# EAGLE board Magician_encoder-Panel-v11 (EAGLE 6.5.0), part 1 of 2
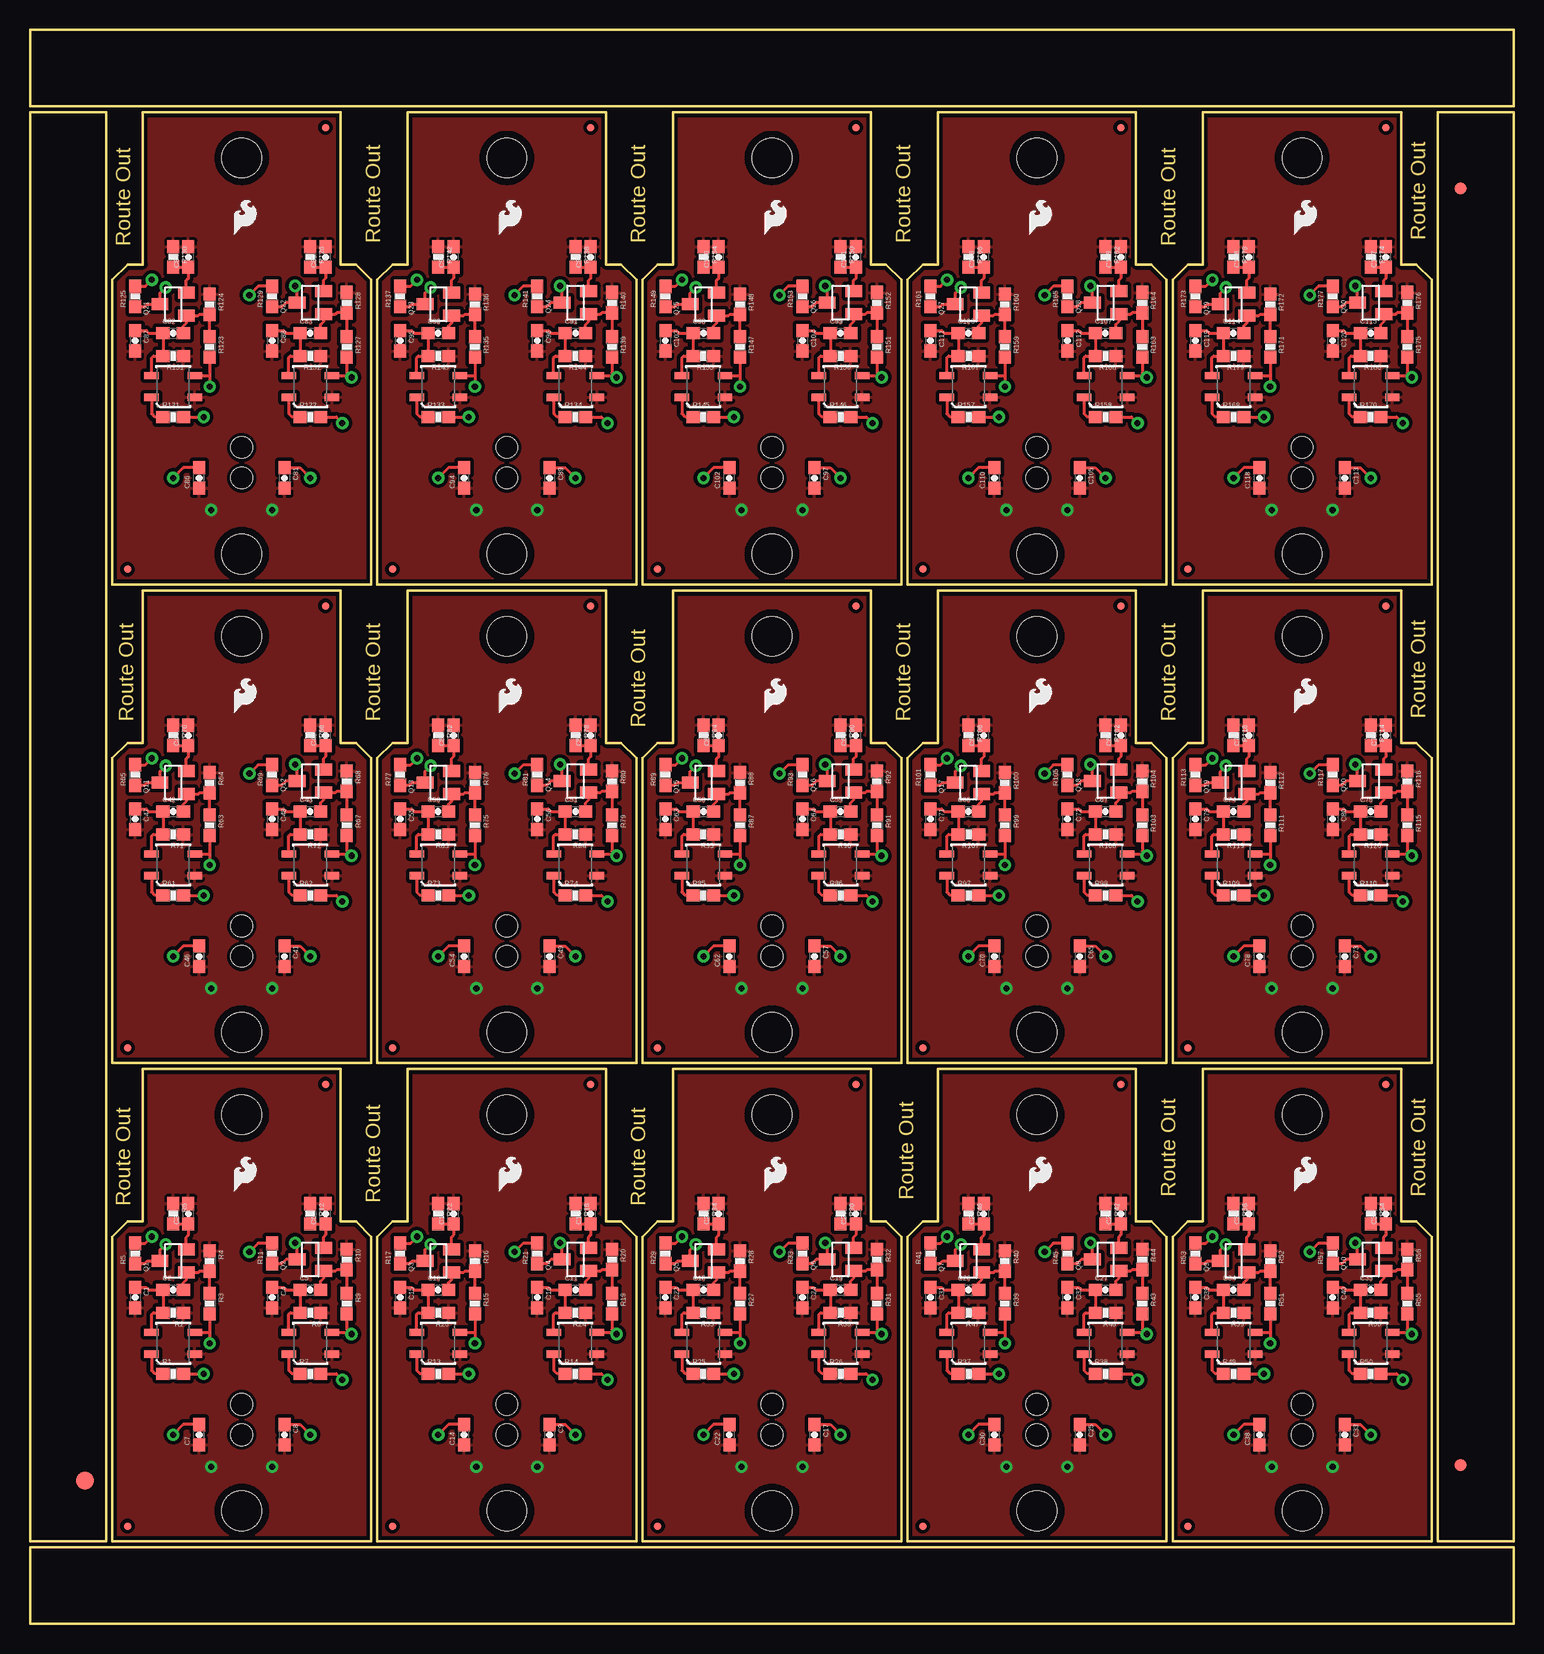
[diagram p0: board, top side]
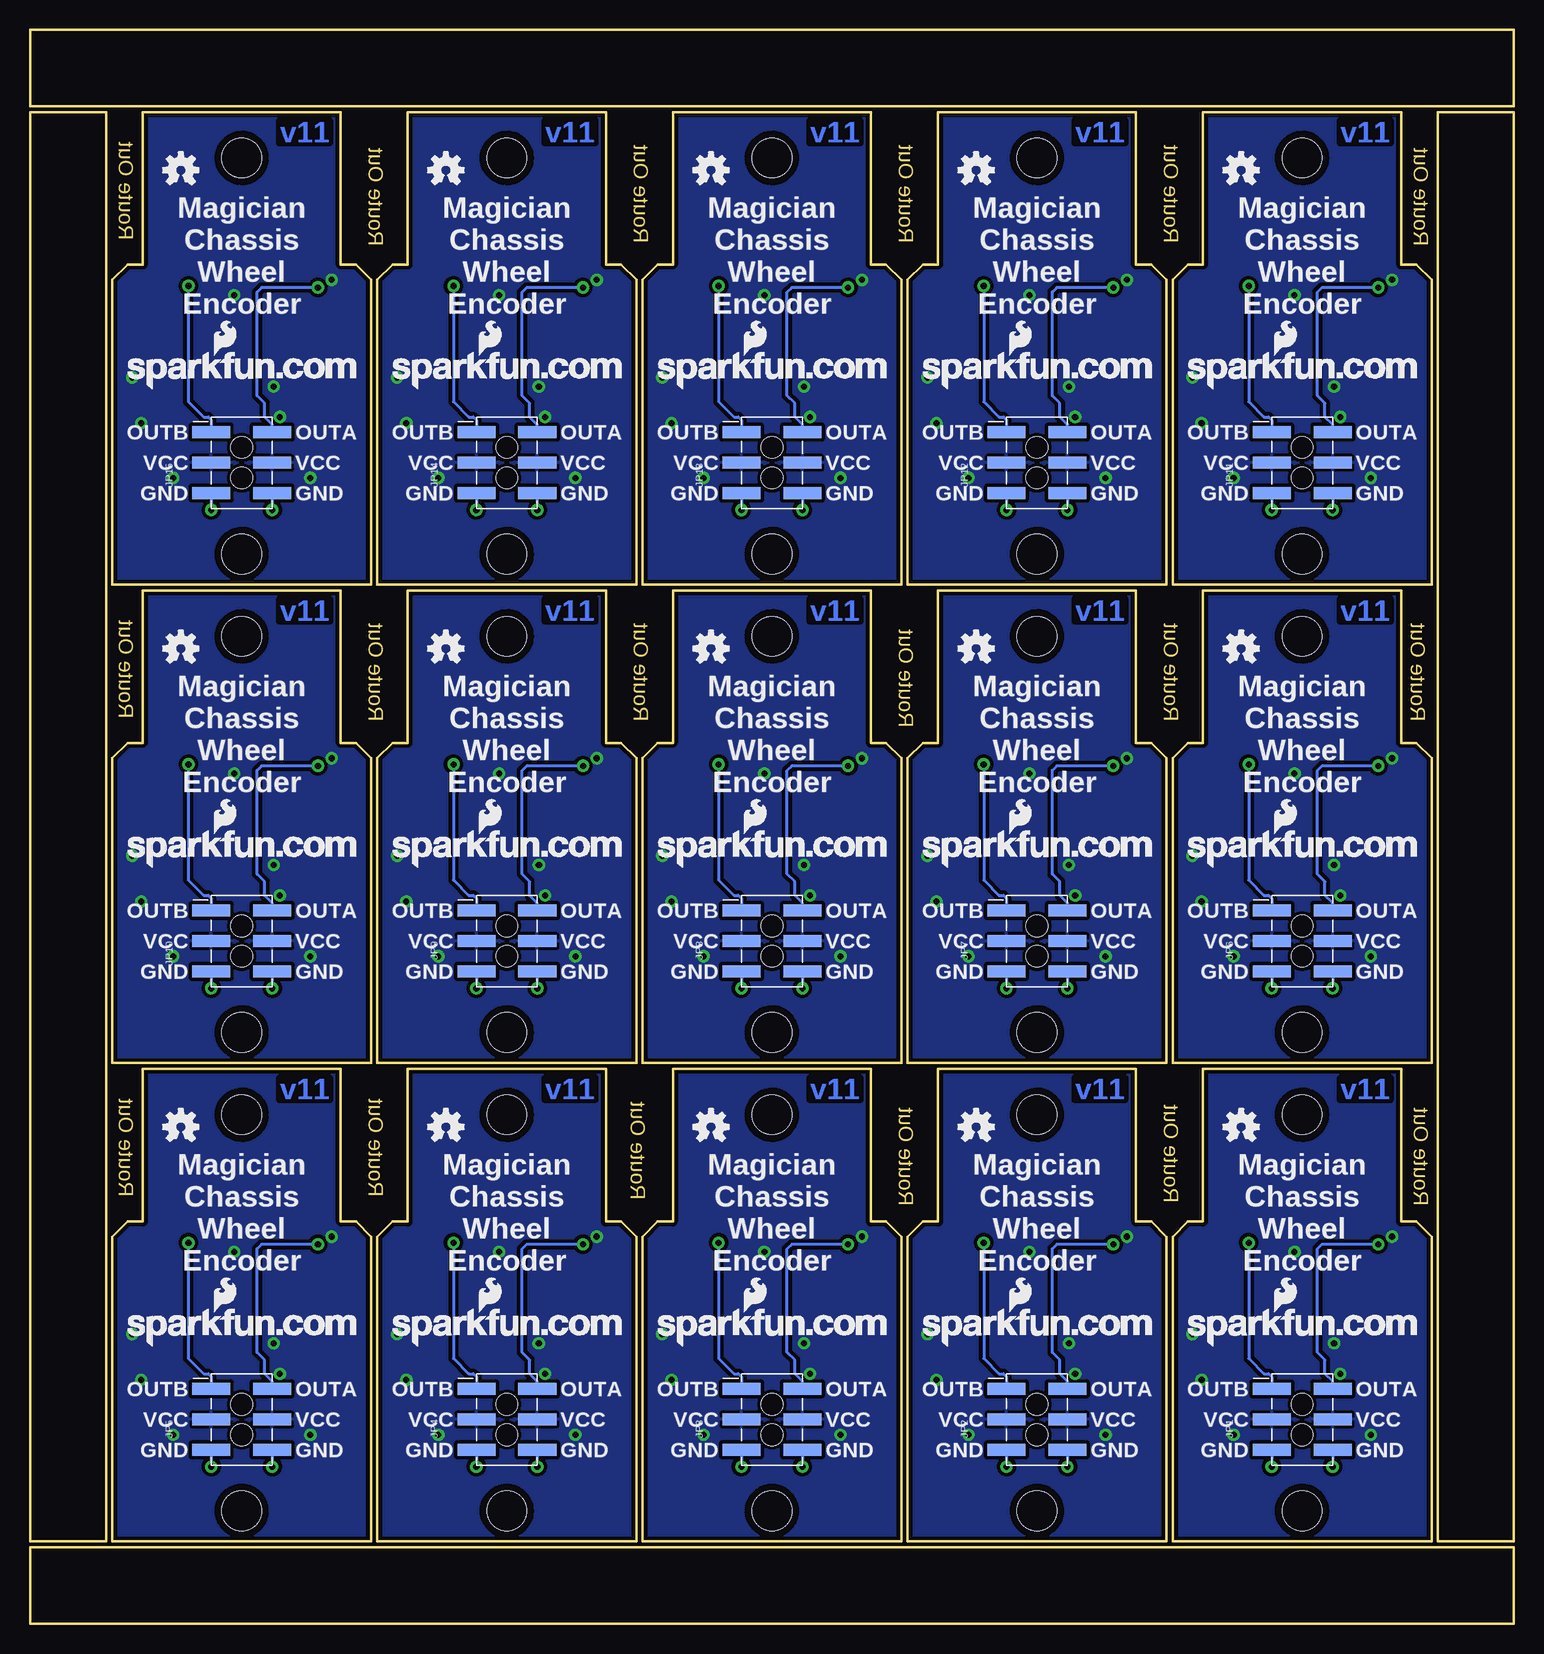
[diagram p1: board, bottom side, seen from below]

Size 123.7 x 132.84 mm. Coordinates in mm from the lower left corner, seen from the top.
Outline: 28.45,32.26 28.45,6.86 6.86,6.86 6.86,32.26 8.13,33.53 9.4,33.53 9.4,46.23 25.91,46.23 25.91,33.53 27.18,33.53 28.45,32.26
Outline: 50.55,32.26 50.55,6.86 28.96,6.86 28.96,32.26 30.23,33.53 31.5,33.53 31.5,46.23 48.01,46.23 48.01,33.53 49.28,33.53 50.55,32.26
Outline: 72.64,32.26 72.64,6.86 51.05,6.86 51.05,32.26 52.32,33.53 53.59,33.53 53.59,46.23 70.1,46.23 70.1,33.53 71.37,33.53 72.64,32.26
Outline: 94.74,32.26 94.74,6.86 73.15,6.86 73.15,32.26 74.42,33.53 75.69,33.53 75.69,46.23 92.2,46.23 92.2,33.53 93.47,33.53 94.74,32.26
Outline: 116.84,32.26 116.84,6.86 95.25,6.86 95.25,32.26 96.52,33.53 97.79,33.53 97.79,46.23 114.3,46.23 114.3,33.53 115.57,33.53 116.84,32.26
Outline: 28.45,72.14 28.45,46.74 6.86,46.74 6.86,72.14 8.13,73.41 9.4,73.41 9.4,86.11 25.91,86.11 25.91,73.41 27.18,73.41 28.45,72.14
Outline: 50.55,72.14 50.55,46.74 28.96,46.74 28.96,72.14 30.23,73.41 31.5,73.41 31.5,86.11 48.01,86.11 48.01,73.41 49.28,73.41 50.55,72.14
Outline: 72.64,72.14 72.64,46.74 51.05,46.74 51.05,72.14 52.32,73.41 53.59,73.41 53.59,86.11 70.1,86.11 70.1,73.41 71.37,73.41 72.64,72.14
Outline: 94.74,72.14 94.74,46.74 73.15,46.74 73.15,72.14 74.42,73.41 75.69,73.41 75.69,86.11 92.2,86.11 92.2,73.41 93.47,73.41 94.74,72.14
Outline: 116.84,72.14 116.84,46.74 95.25,46.74 95.25,72.14 96.52,73.41 97.79,73.41 97.79,86.11 114.3,86.11 114.3,73.41 115.57,73.41 116.84,72.14
Outline: 28.45,112.01 28.45,86.61 6.86,86.61 6.86,112.01 8.13,113.28 9.4,113.28 9.4,125.98 25.91,125.98 25.91,113.28 27.18,113.28 28.45,112.01
Outline: 50.55,112.01 50.55,86.61 28.96,86.61 28.96,112.01 30.23,113.28 31.5,113.28 31.5,125.98 48.01,125.98 48.01,113.28 49.28,113.28 50.55,112.01
Outline: 72.64,112.01 72.64,86.61 51.05,86.61 51.05,112.01 52.32,113.28 53.59,113.28 53.59,125.98 70.1,125.98 70.1,113.28 71.37,113.28 72.64,112.01
Outline: 94.74,112.01 94.74,86.61 73.15,86.61 73.15,112.01 74.42,113.28 75.69,113.28 75.69,125.98 92.2,125.98 92.2,113.28 93.47,113.28 94.74,112.01
Outline: 116.84,112.01 116.84,86.61 95.25,86.61 95.25,112.01 96.52,113.28 97.79,113.28 97.79,125.98 114.3,125.98 114.3,113.28 115.57,113.28 116.84,112.01
Outline: 6.35,6.86 6.35,125.98 0,125.98 0,6.86 6.35,6.86
Outline: 0,0 123.7,0 123.7,6.35 0,6.35 0,0
Outline: 123.7,6.86 123.7,125.98 117.35,125.98 117.35,6.86 123.7,6.86
Outline: 123.7,132.84 0,132.84 0,126.49 123.7,126.49 123.7,132.84
Copper layers (1*16): Top 0.035mm / dielectric 1.5mm / Bottom 0.035mm
Design rules "Sparkfun": minimum track width 8mil, minimum drill 20mil, track to track 8mil, track to pad 8mil, pad to pad 8mil, via to via 8mil, smd to smd 8mil, copper to edge 8mil, drill to drill 8mil, minimum pad ring 12mil, minimum via ring 10mil, stop-mask expansion 4mil, vias tented up to drill 20mil, thermal gap 10mil

## Footprints (pad centres in the part's own frame; a part is rotated, then mirrored left to right if it is on the bottom)
0603-CAP = smd 1.1 x 1: 1 -0.85,0; 2 0.85,0
FIDUCIAL-1.5X3 = smd 1.5 x 1.5: 1 0,0
FIDUCIAL-1X2 = smd 1 x 1: 1 0,0
MICRO-FIDUCIAL = smd 0.635 x 0.635: 1 0,0
2X3_SMT_POSTS = smd 1 x 3.17: 1 -2.54,-2.54; 2 -2.54,2.54; 3 0,-2.54; 4 0,2.54; 5 2.54,-2.54; 6 2.54,2.54 | hole 1.8: -1.27,0; 1.27,0
SOT23 = smd 1 x 1.4: 1 -0.95,-1.1; 2 0.95,-1.1; 3 0,1.1
0603-RES = smd 1.1 x 1: 1 -0.85,0; 2 0.85,0
STAND-OFF = hole 3.302: 0,0
QRE1113 = smd 1.2 x 0.6: 1 -1.8,-0.9; 2 1.8,-0.9; 3 1.8,0.9; 4 -1.8,0.9

## Placement (x,y rotation side)
C1  0.1uF  [0603-CAP]  8.76,27.18 270 top
C2  1.0uF  [0603-CAP]  11.94,27.81 0 top
C3  0.1uF  [0603-CAP]  13.21,34.16 90 top
C4  0.1uF  [0603-CAP]  20.19,27.18 270 top
C5  1.0uF  [0603-CAP]  23.37,27.81 0 top
C6  0.1uF  [0603-CAP]  24.64,34.16 90 top
C7  1.0uF  [0603-CAP]  14.1,15.75 90 top
C8  0.1uF  [0603-CAP]  21.21,15.75 270 top
C9  0.1uF  [0603-CAP]  43.31,15.75 270 top
C10  1.0uF  [0603-CAP]  34.04,27.81 0 top
C11  1.0uF  [0603-CAP]  45.47,27.81 0 top
C12  0.1uF  [0603-CAP]  35.31,34.16 90 top
C13  0.1uF  [0603-CAP]  46.74,34.16 90 top
C14  1.0uF  [0603-CAP]  36.2,15.75 90 top
C15  0.1uF  [0603-CAP]  30.86,27.18 270 top
C16  0.1uF  [0603-CAP]  42.29,27.18 270 top
C17  0.1uF  [0603-CAP]  65.41,15.75 270 top
C18  1.0uF  [0603-CAP]  56.13,27.81 0 top
C19  1.0uF  [0603-CAP]  67.56,27.81 0 top
C20  0.1uF  [0603-CAP]  57.4,34.16 90 top
C21  0.1uF  [0603-CAP]  68.83,34.16 90 top
C22  1.0uF  [0603-CAP]  58.29,15.75 90 top
C23  0.1uF  [0603-CAP]  52.96,27.18 270 top
C24  0.1uF  [0603-CAP]  64.39,27.18 270 top
C25  0.1uF  [0603-CAP]  87.5,15.75 270 top
C26  1.0uF  [0603-CAP]  78.23,27.81 0 top
C27  1.0uF  [0603-CAP]  89.66,27.81 0 top
C28  0.1uF  [0603-CAP]  79.5,34.16 90 top
C29  0.1uF  [0603-CAP]  90.93,34.16 90 top
C30  1.0uF  [0603-CAP]  80.39,15.75 90 top
C31  0.1uF  [0603-CAP]  75.06,27.18 270 top
C32  0.1uF  [0603-CAP]  86.49,27.18 270 top
C33  0.1uF  [0603-CAP]  109.6,15.75 270 top
C34  1.0uF  [0603-CAP]  100.33,27.81 0 top
C35  1.0uF  [0603-CAP]  111.76,27.81 0 top
C36  0.1uF  [0603-CAP]  101.6,34.16 90 top
C37  0.1uF  [0603-CAP]  113.03,34.16 90 top
C38  1.0uF  [0603-CAP]  102.49,15.75 90 top
C39  0.1uF  [0603-CAP]  97.16,27.18 270 top
C40  0.1uF  [0603-CAP]  108.59,27.18 270 top
C41  0.1uF  [0603-CAP]  21.21,55.63 270 top
C42  1.0uF  [0603-CAP]  11.94,67.69 0 top
C43  1.0uF  [0603-CAP]  23.37,67.69 0 top
C44  0.1uF  [0603-CAP]  13.21,74.04 90 top
C45  0.1uF  [0603-CAP]  24.64,74.04 90 top
C46  1.0uF  [0603-CAP]  14.1,55.63 90 top
C47  0.1uF  [0603-CAP]  8.76,67.06 270 top
C48  0.1uF  [0603-CAP]  20.19,67.06 270 top
C49  0.1uF  [0603-CAP]  43.31,55.63 270 top
C50  1.0uF  [0603-CAP]  34.04,67.69 0 top
C51  1.0uF  [0603-CAP]  45.47,67.69 0 top
C52  0.1uF  [0603-CAP]  35.31,74.04 90 top
C53  0.1uF  [0603-CAP]  46.74,74.04 90 top
C54  1.0uF  [0603-CAP]  36.2,55.63 90 top
C55  0.1uF  [0603-CAP]  30.86,67.06 270 top
C56  0.1uF  [0603-CAP]  42.29,67.06 270 top
C57  0.1uF  [0603-CAP]  65.41,55.63 270 top
C58  1.0uF  [0603-CAP]  56.13,67.69 0 top
C59  1.0uF  [0603-CAP]  67.56,67.69 0 top
C60  0.1uF  [0603-CAP]  57.4,74.04 90 top
C61  0.1uF  [0603-CAP]  68.83,74.04 90 top
C62  1.0uF  [0603-CAP]  58.29,55.63 90 top
C63  0.1uF  [0603-CAP]  52.96,67.06 270 top
C64  0.1uF  [0603-CAP]  64.39,67.06 270 top
C65  0.1uF  [0603-CAP]  87.5,55.63 270 top
C66  1.0uF  [0603-CAP]  78.23,67.69 0 top
C67  1.0uF  [0603-CAP]  89.66,67.69 0 top
C68  0.1uF  [0603-CAP]  79.5,74.04 90 top
C69  0.1uF  [0603-CAP]  90.93,74.04 90 top
C70  1.0uF  [0603-CAP]  80.39,55.63 90 top
C71  0.1uF  [0603-CAP]  75.06,67.06 270 top
C72  0.1uF  [0603-CAP]  86.49,67.06 270 top
C73  0.1uF  [0603-CAP]  109.6,55.63 270 top
C74  1.0uF  [0603-CAP]  100.33,67.69 0 top
C75  1.0uF  [0603-CAP]  111.76,67.69 0 top
C76  0.1uF  [0603-CAP]  101.6,74.04 90 top
C77  0.1uF  [0603-CAP]  113.03,74.04 90 top
C78  1.0uF  [0603-CAP]  102.49,55.63 90 top
C79  0.1uF  [0603-CAP]  97.16,67.06 270 top
C80  0.1uF  [0603-CAP]  108.59,67.06 270 top
C81  0.1uF  [0603-CAP]  21.21,95.5 270 top
C82  1.0uF  [0603-CAP]  11.94,107.57 0 top
C83  1.0uF  [0603-CAP]  23.37,107.57 0 top
C84  0.1uF  [0603-CAP]  13.21,113.92 90 top
C85  0.1uF  [0603-CAP]  24.64,113.92 90 top
C86  1.0uF  [0603-CAP]  14.1,95.5 90 top
C87  0.1uF  [0603-CAP]  8.76,106.93 270 top
C88  0.1uF  [0603-CAP]  20.19,106.93 270 top
C89  0.1uF  [0603-CAP]  43.31,95.5 270 top
C90  1.0uF  [0603-CAP]  34.04,107.57 0 top
C91  1.0uF  [0603-CAP]  45.47,107.57 0 top
C92  0.1uF  [0603-CAP]  35.31,113.92 90 top
C93  0.1uF  [0603-CAP]  46.74,113.92 90 top
C94  1.0uF  [0603-CAP]  36.2,95.5 90 top
C95  0.1uF  [0603-CAP]  30.86,106.93 270 top
C96  0.1uF  [0603-CAP]  42.29,106.93 270 top
C97  0.1uF  [0603-CAP]  65.41,95.5 270 top
C98  1.0uF  [0603-CAP]  56.13,107.57 0 top
C99  1.0uF  [0603-CAP]  67.56,107.57 0 top
C100  0.1uF  [0603-CAP]  57.4,113.92 90 top
C101  0.1uF  [0603-CAP]  68.83,113.92 90 top
C102  1.0uF  [0603-CAP]  58.29,95.5 90 top
C103  0.1uF  [0603-CAP]  52.96,106.93 270 top
C104  0.1uF  [0603-CAP]  64.39,106.93 270 top
C105  0.1uF  [0603-CAP]  87.5,95.5 270 top
C106  1.0uF  [0603-CAP]  78.23,107.57 0 top
C107  1.0uF  [0603-CAP]  89.66,107.57 0 top
C108  0.1uF  [0603-CAP]  79.5,113.92 90 top
C109  0.1uF  [0603-CAP]  90.93,113.92 90 top
C110  1.0uF  [0603-CAP]  80.39,95.5 90 top
C111  0.1uF  [0603-CAP]  75.06,106.93 270 top
C112  0.1uF  [0603-CAP]  86.49,106.93 270 top
C113  0.1uF  [0603-CAP]  109.6,95.5 270 top
C114  1.0uF  [0603-CAP]  100.33,107.57 0 top
C115  1.0uF  [0603-CAP]  111.76,107.57 0 top
C116  0.1uF  [0603-CAP]  101.6,113.92 90 top
C117  0.1uF  [0603-CAP]  113.03,113.92 90 top
C118  1.0uF  [0603-CAP]  102.49,95.5 90 top
C119  0.1uF  [0603-CAP]  97.16,106.93 270 top
C120  0.1uF  [0603-CAP]  108.59,106.93 270 top
E$1  [FIDUCIAL-1.5X3]  4.57,11.94 0 top
E$4  [FIDUCIAL-1X2]  119.25,13.21 0 top
E$5  [FIDUCIAL-1X2]  119.25,119.63 180 top
FID1  FIDUCIALUFIDUCIAL  [MICRO-FIDUCIAL]  24.64,44.96 0 top
FID2  FIDUCIALUFIDUCIAL  [MICRO-FIDUCIAL]  8.13,8.13 0 top
FID3  FIDUCIALUFIDUCIAL  [MICRO-FIDUCIAL]  46.74,44.96 0 top
FID4  FIDUCIALUFIDUCIAL  [MICRO-FIDUCIAL]  30.23,8.13 0 top
FID5  FIDUCIALUFIDUCIAL  [MICRO-FIDUCIAL]  68.83,44.96 0 top
FID6  FIDUCIALUFIDUCIAL  [MICRO-FIDUCIAL]  52.32,8.13 0 top
FID7  FIDUCIALUFIDUCIAL  [MICRO-FIDUCIAL]  90.93,44.96 0 top
FID8  FIDUCIALUFIDUCIAL  [MICRO-FIDUCIAL]  74.42,8.13 0 top
FID9  FIDUCIALUFIDUCIAL  [MICRO-FIDUCIAL]  113.03,44.96 0 top
FID10  FIDUCIALUFIDUCIAL  [MICRO-FIDUCIAL]  96.52,8.13 0 top
FID11  FIDUCIALUFIDUCIAL  [MICRO-FIDUCIAL]  24.64,84.84 0 top
FID12  FIDUCIALUFIDUCIAL  [MICRO-FIDUCIAL]  8.13,48.01 0 top
FID13  FIDUCIALUFIDUCIAL  [MICRO-FIDUCIAL]  46.74,84.84 0 top
FID14  FIDUCIALUFIDUCIAL  [MICRO-FIDUCIAL]  30.23,48.01 0 top
FID15  FIDUCIALUFIDUCIAL  [MICRO-FIDUCIAL]  68.83,84.84 0 top
FID16  FIDUCIALUFIDUCIAL  [MICRO-FIDUCIAL]  52.32,48.01 0 top
FID17  FIDUCIALUFIDUCIAL  [MICRO-FIDUCIAL]  90.93,84.84 0 top
FID18  FIDUCIALUFIDUCIAL  [MICRO-FIDUCIAL]  74.42,48.01 0 top
FID19  FIDUCIALUFIDUCIAL  [MICRO-FIDUCIAL]  113.03,84.84 0 top
FID20  FIDUCIALUFIDUCIAL  [MICRO-FIDUCIAL]  96.52,48.01 0 top
FID21  FIDUCIALUFIDUCIAL  [MICRO-FIDUCIAL]  24.64,124.71 0 top
FID22  FIDUCIALUFIDUCIAL  [MICRO-FIDUCIAL]  8.13,87.88 0 top
FID23  FIDUCIALUFIDUCIAL  [MICRO-FIDUCIAL]  46.74,124.71 0 top
FID24  FIDUCIALUFIDUCIAL  [MICRO-FIDUCIAL]  30.23,87.88 0 top
FID25  FIDUCIALUFIDUCIAL  [MICRO-FIDUCIAL]  68.83,124.71 0 top
FID26  FIDUCIALUFIDUCIAL  [MICRO-FIDUCIAL]  52.32,87.88 0 top
FID27  FIDUCIALUFIDUCIAL  [MICRO-FIDUCIAL]  90.93,124.71 0 top
FID28  FIDUCIALUFIDUCIAL  [MICRO-FIDUCIAL]  74.42,87.88 0 top
FID29  FIDUCIALUFIDUCIAL  [MICRO-FIDUCIAL]  113.03,124.71 0 top
FID30  FIDUCIALUFIDUCIAL  [MICRO-FIDUCIAL]  96.52,87.88 0 top
JP1  [2X3_SMT_POSTS]  17.65,17.02 270 bottom
JP2  [2X3_SMT_POSTS]  39.75,17.02 270 bottom
JP3  [2X3_SMT_POSTS]  61.85,17.02 270 bottom
JP4  [2X3_SMT_POSTS]  83.95,17.02 270 bottom
JP5  [2X3_SMT_POSTS]  106.05,17.02 270 bottom
JP6  [2X3_SMT_POSTS]  17.65,56.9 270 bottom
JP7  [2X3_SMT_POSTS]  39.75,56.9 270 bottom
JP8  [2X3_SMT_POSTS]  61.85,56.9 270 bottom
JP9  [2X3_SMT_POSTS]  83.95,56.9 270 bottom
JP10  [2X3_SMT_POSTS]  106.05,56.9 270 bottom
JP11  [2X3_SMT_POSTS]  17.65,96.77 270 bottom
JP12  [2X3_SMT_POSTS]  39.75,96.77 270 bottom
JP13  [2X3_SMT_POSTS]  61.85,96.77 270 bottom
JP14  [2X3_SMT_POSTS]  83.95,96.77 270 bottom
JP15  [2X3_SMT_POSTS]  106.05,96.77 270 bottom
LOGO1  LOGO-SFESK  [SFE-LOGO-FLAME]  17.02,36.07 0 top
LOGO2  OSHW-LOGOS  [OSHW-LOGO-S]  44.83,41.4 0 bottom
LOGO3  OSHW-LOGOS  [OSHW-LOGO-S]  22.73,41.4 0 bottom
LOGO4  LOGO-SFENEW  [SFE-NEW-WEBLOGO]  27.18,23.11 0 bottom
LOGO5  LOGO-SFENEW  [SFE-NEW-WEBLOGO]  49.28,23.11 0 bottom
LOGO6  LOGO-SFESK  [SFE-LOGO-FLAME]  39.12,36.07 0 top
LOGO7  OSHW-LOGOS  [OSHW-LOGO-S]  66.93,41.4 0 bottom
LOGO8  LOGO-SFENEW  [SFE-NEW-WEBLOGO]  71.37,23.11 0 bottom
LOGO9  LOGO-SFESK  [SFE-LOGO-FLAME]  61.21,36.07 0 top
LOGO10  OSHW-LOGOS  [OSHW-LOGO-S]  89.03,41.4 0 bottom
LOGO11  LOGO-SFENEW  [SFE-NEW-WEBLOGO]  93.47,23.11 0 bottom
LOGO12  LOGO-SFESK  [SFE-LOGO-FLAME]  83.31,36.07 0 top
LOGO13  OSHW-LOGOS  [OSHW-LOGO-S]  111.12,41.4 0 bottom
LOGO14  LOGO-SFENEW  [SFE-NEW-WEBLOGO]  115.57,23.11 0 bottom
LOGO15  LOGO-SFESK  [SFE-LOGO-FLAME]  105.41,36.07 0 top
LOGO16  OSHW-LOGOS  [OSHW-LOGO-S]  22.73,81.28 0 bottom
LOGO17  LOGO-SFENEW  [SFE-NEW-WEBLOGO]  27.18,62.99 0 bottom
LOGO18  LOGO-SFESK  [SFE-LOGO-FLAME]  17.02,75.95 0 top
LOGO19  OSHW-LOGOS  [OSHW-LOGO-S]  44.83,81.28 0 bottom
LOGO20  LOGO-SFENEW  [SFE-NEW-WEBLOGO]  49.28,62.99 0 bottom
LOGO21  LOGO-SFESK  [SFE-LOGO-FLAME]  39.12,75.95 0 top
LOGO22  OSHW-LOGOS  [OSHW-LOGO-S]  66.93,81.28 0 bottom
LOGO23  LOGO-SFENEW  [SFE-NEW-WEBLOGO]  71.37,62.99 0 bottom
LOGO24  LOGO-SFESK  [SFE-LOGO-FLAME]  61.21,75.95 0 top
LOGO25  OSHW-LOGOS  [OSHW-LOGO-S]  89.03,81.28 0 bottom
LOGO26  LOGO-SFENEW  [SFE-NEW-WEBLOGO]  93.47,62.99 0 bottom
LOGO27  LOGO-SFESK  [SFE-LOGO-FLAME]  83.31,75.95 0 top
LOGO28  OSHW-LOGOS  [OSHW-LOGO-S]  111.12,81.28 0 bottom
LOGO29  LOGO-SFENEW  [SFE-NEW-WEBLOGO]  115.57,62.99 0 bottom
LOGO30  LOGO-SFESK  [SFE-LOGO-FLAME]  105.41,75.95 0 top
LOGO31  OSHW-LOGOS  [OSHW-LOGO-S]  22.73,121.16 0 bottom
LOGO32  LOGO-SFENEW  [SFE-NEW-WEBLOGO]  27.18,102.87 0 bottom
LOGO33  LOGO-SFESK  [SFE-LOGO-FLAME]  17.02,115.82 0 top
LOGO34  OSHW-LOGOS  [OSHW-LOGO-S]  44.83,121.16 0 bottom
LOGO35  LOGO-SFENEW  [SFE-NEW-WEBLOGO]  49.28,102.87 0 bottom
LOGO36  LOGO-SFESK  [SFE-LOGO-FLAME]  39.12,115.82 0 top
LOGO37  OSHW-LOGOS  [OSHW-LOGO-S]  66.93,121.16 0 bottom
LOGO38  LOGO-SFENEW  [SFE-NEW-WEBLOGO]  71.37,102.87 0 bottom
LOGO39  LOGO-SFESK  [SFE-LOGO-FLAME]  61.21,115.82 0 top
LOGO40  OSHW-LOGOS  [OSHW-LOGO-S]  89.03,121.16 0 bottom
LOGO41  LOGO-SFENEW  [SFE-NEW-WEBLOGO]  93.47,102.87 0 bottom
LOGO42  LOGO-SFESK  [SFE-LOGO-FLAME]  83.31,115.82 0 top
LOGO43  OSHW-LOGOS  [OSHW-LOGO-S]  111.12,121.16 0 bottom
LOGO44  LOGO-SFENEW  [SFE-NEW-WEBLOGO]  115.57,102.87 0 bottom
LOGO45  LOGO-SFESK  [SFE-LOGO-FLAME]  105.41,115.82 0 top
Q1  MMBT2222A  [SOT23]  11.94,30.23 90 top
Q2  MMBT2222A  [SOT23]  23.37,30.35 90 top
Q3  MMBT2222A  [SOT23]  34.04,30.23 90 top
Q4  MMBT2222A  [SOT23]  45.47,30.35 90 top
Q5  MMBT2222A  [SOT23]  56.13,30.23 90 top
Q6  MMBT2222A  [SOT23]  67.56,30.35 90 top
Q7  MMBT2222A  [SOT23]  78.23,30.23 90 top
Q8  MMBT2222A  [SOT23]  89.66,30.35 90 top
Q9  MMBT2222A  [SOT23]  100.33,30.23 90 top
Q10  MMBT2222A  [SOT23]  111.76,30.35 90 top
Q11  MMBT2222A  [SOT23]  11.94,70.1 90 top
Q12  MMBT2222A  [SOT23]  23.37,70.23 90 top
Q13  MMBT2222A  [SOT23]  34.04,70.1 90 top
Q14  MMBT2222A  [SOT23]  45.47,70.23 90 top
Q15  MMBT2222A  [SOT23]  56.13,70.1 90 top
Q16  MMBT2222A  [SOT23]  67.56,70.23 90 top
Q17  MMBT2222A  [SOT23]  78.23,70.1 90 top
Q18  MMBT2222A  [SOT23]  89.66,70.23 90 top
Q19  MMBT2222A  [SOT23]  100.33,70.1 90 top
Q20  MMBT2222A  [SOT23]  111.76,70.23 90 top
Q21  MMBT2222A  [SOT23]  11.94,109.98 90 top
Q22  MMBT2222A  [SOT23]  23.37,110.11 90 top
Q23  MMBT2222A  [SOT23]  34.04,109.98 90 top
Q24  MMBT2222A  [SOT23]  45.47,110.11 90 top
Q25  MMBT2222A  [SOT23]  56.13,109.98 90 top
Q26  MMBT2222A  [SOT23]  67.56,110.11 90 top
Q27  MMBT2222A  [SOT23]  78.23,109.98 90 top
Q28  MMBT2222A  [SOT23]  89.66,110.11 90 top
Q29  MMBT2222A  [SOT23]  100.33,109.98 90 top
Q30  MMBT2222A  [SOT23]  111.76,110.11 90 top
R1  100  [0603-RES]  11.94,20.83 0 top
R2  10K  [0603-RES]  11.94,25.91 180 top
R3  47K  [0603-RES]  14.99,26.67 270 top
R4  6.8K  [0603-RES]  14.99,30.23 270 top
R5  4.7K  [0603-RES]  8.76,30.86 90 top
R6  100  [0603-RES]  11.94,34.16 270 top
R7  100  [0603-RES]  23.37,20.83 0 top
R8  10K  [0603-RES]  23.37,25.91 180 top
R9  47K  [0603-RES]  26.42,26.67 270 top
R10  6.8K  [0603-RES]  26.42,30.35 270 top
R11  4.7K  [0603-RES]  20.19,30.86 90 top
R12  100  [0603-RES]  23.37,34.16 270 top
R13  100  [0603-RES]  34.04,20.83 0 top
R14  100  [0603-RES]  45.47,20.83 0 top
R15  47K  [0603-RES]  37.08,26.67 270 top
R16  6.8K  [0603-RES]  37.08,30.23 270 top
R17  4.7K  [0603-RES]  30.86,30.86 90 top
R18  100  [0603-RES]  45.47,34.16 270 top
R19  47K  [0603-RES]  48.51,26.67 270 top
R20  6.8K  [0603-RES]  48.51,30.35 270 top
R21  4.7K  [0603-RES]  42.29,30.86 90 top
R22  100  [0603-RES]  34.04,34.16 270 top
R23  10K  [0603-RES]  34.04,25.91 180 top
R24  10K  [0603-RES]  45.47,25.91 180 top
R25  100  [0603-RES]  56.13,20.83 0 top
R26  100  [0603-RES]  67.56,20.83 0 top
R27  47K  [0603-RES]  59.18,26.67 270 top
R28  6.8K  [0603-RES]  59.18,30.23 270 top
R29  4.7K  [0603-RES]  52.96,30.86 90 top
R30  100  [0603-RES]  67.56,34.16 270 top
R31  47K  [0603-RES]  70.61,26.67 270 top
R32  6.8K  [0603-RES]  70.61,30.35 270 top
R33  4.7K  [0603-RES]  64.39,30.86 90 top
R34  100  [0603-RES]  56.13,34.16 270 top
R35  10K  [0603-RES]  56.13,25.91 180 top
R36  10K  [0603-RES]  67.56,25.91 180 top
R37  100  [0603-RES]  78.23,20.83 0 top
R38  100  [0603-RES]  89.66,20.83 0 top
R39  47K  [0603-RES]  81.28,26.67 270 top
R40  6.8K  [0603-RES]  81.28,30.23 270 top
R41  4.7K  [0603-RES]  75.06,30.86 90 top
R42  100  [0603-RES]  89.66,34.16 270 top
R43  47K  [0603-RES]  92.71,26.67 270 top
R44  6.8K  [0603-RES]  92.71,30.35 270 top
R45  4.7K  [0603-RES]  86.49,30.86 90 top
R46  100  [0603-RES]  78.23,34.16 270 top
R47  10K  [0603-RES]  78.23,25.91 180 top
R48  10K  [0603-RES]  89.66,25.91 180 top
R49  100  [0603-RES]  100.33,20.83 0 top
R50  100  [0603-RES]  111.76,20.83 0 top
R51  47K  [0603-RES]  103.38,26.67 270 top
R52  6.8K  [0603-RES]  103.38,30.23 270 top
R53  4.7K  [0603-RES]  97.16,30.86 90 top
R54  100  [0603-RES]  111.76,34.16 270 top
R55  47K  [0603-RES]  114.81,26.67 270 top
R56  6.8K  [0603-RES]  114.81,30.35 270 top
R57  4.7K  [0603-RES]  108.59,30.86 90 top
R58  100  [0603-RES]  100.33,34.16 270 top
R59  10K  [0603-RES]  100.33,25.91 180 top
R60  10K  [0603-RES]  111.76,25.91 180 top
R61  100  [0603-RES]  11.94,60.71 0 top
R62  100  [0603-RES]  23.37,60.71 0 top
R63  47K  [0603-RES]  14.99,66.55 270 top
R64  6.8K  [0603-RES]  14.99,70.1 270 top
R65  4.7K  [0603-RES]  8.76,70.74 90 top
R66  100  [0603-RES]  23.37,74.04 270 top
R67  47K  [0603-RES]  26.42,66.55 270 top
R68  6.8K  [0603-RES]  26.42,70.23 270 top
R69  4.7K  [0603-RES]  20.19,70.74 90 top
R70  100  [0603-RES]  11.94,74.04 270 top
R71  10K  [0603-RES]  11.94,65.79 180 top
R72  10K  [0603-RES]  23.37,65.79 180 top
R73  100  [0603-RES]  34.04,60.71 0 top
R74  100  [0603-RES]  45.47,60.71 0 top
R75  47K  [0603-RES]  37.08,66.55 270 top
R76  6.8K  [0603-RES]  37.08,70.1 270 top
R77  4.7K  [0603-RES]  30.86,70.74 90 top
R78  100  [0603-RES]  45.47,74.04 270 top
R79  47K  [0603-RES]  48.51,66.55 270 top
R80  6.8K  [0603-RES]  48.51,70.23 270 top
R81  4.7K  [0603-RES]  42.29,70.74 90 top
R82  100  [0603-RES]  34.04,74.04 270 top
R83  10K  [0603-RES]  34.04,65.79 180 top
R84  10K  [0603-RES]  45.47,65.79 180 top
R85  100  [0603-RES]  56.13,60.71 0 top
R86  100  [0603-RES]  67.56,60.71 0 top
R87  47K  [0603-RES]  59.18,66.55 270 top
R88  6.8K  [0603-RES]  59.18,70.1 270 top
R89  4.7K  [0603-RES]  52.96,70.74 90 top
R90  100  [0603-RES]  67.56,74.04 270 top
R91  47K  [0603-RES]  70.61,66.55 270 top
R92  6.8K  [0603-RES]  70.61,70.23 270 top
R93  4.7K  [0603-RES]  64.39,70.74 90 top
R94  100  [0603-RES]  56.13,74.04 270 top
R95  10K  [0603-RES]  56.13,65.79 180 top
R96  10K  [0603-RES]  67.56,65.79 180 top
R97  100  [0603-RES]  78.23,60.71 0 top
R98  100  [0603-RES]  89.66,60.71 0 top
R99  47K  [0603-RES]  81.28,66.55 270 top
R100  6.8K  [0603-RES]  81.28,70.1 270 top
R101  4.7K  [0603-RES]  75.06,70.74 90 top
R102  100  [0603-RES]  89.66,74.04 270 top
R103  47K  [0603-RES]  92.71,66.55 270 top
R104  6.8K  [0603-RES]  92.71,70.23 270 top
R105  4.7K  [0603-RES]  86.49,70.74 90 top
R106  100  [0603-RES]  78.23,74.04 270 top
R107  10K  [0603-RES]  78.23,65.79 180 top
R108  10K  [0603-RES]  89.66,65.79 180 top
R109  100  [0603-RES]  100.33,60.71 0 top
R110  100  [0603-RES]  111.76,60.71 0 top
R111  47K  [0603-RES]  103.38,66.55 270 top
R112  6.8K  [0603-RES]  103.38,70.1 270 top
R113  4.7K  [0603-RES]  97.16,70.74 90 top
R114  100  [0603-RES]  111.76,74.04 270 top
R115  47K  [0603-RES]  114.81,66.55 270 top
R116  6.8K  [0603-RES]  114.81,70.23 270 top
R117  4.7K  [0603-RES]  108.59,70.74 90 top
R118  100  [0603-RES]  100.33,74.04 270 top
R119  10K  [0603-RES]  100.33,65.79 180 top
R120  10K  [0603-RES]  111.76,65.79 180 top
R121  100  [0603-RES]  11.94,100.58 0 top
R122  100  [0603-RES]  23.37,100.58 0 top
R123  47K  [0603-RES]  14.99,106.43 270 top
R124  6.8K  [0603-RES]  14.99,109.98 270 top
R125  4.7K  [0603-RES]  8.76,110.62 90 top
R126  100  [0603-RES]  23.37,113.92 270 top
R127  47K  [0603-RES]  26.42,106.43 270 top
R128  6.8K  [0603-RES]  26.42,110.11 270 top
R129  4.7K  [0603-RES]  20.19,110.62 90 top
R130  100  [0603-RES]  11.94,113.92 270 top
R131  10K  [0603-RES]  11.94,105.66 180 top
R132  10K  [0603-RES]  23.37,105.66 180 top
R133  100  [0603-RES]  34.04,100.58 0 top
R134  100  [0603-RES]  45.47,100.58 0 top
R135  47K  [0603-RES]  37.08,106.43 270 top
R136  6.8K  [0603-RES]  37.08,109.98 270 top
R137  4.7K  [0603-RES]  30.86,110.62 90 top
R138  100  [0603-RES]  45.47,113.92 270 top
R139  47K  [0603-RES]  48.51,106.43 270 top
R140  6.8K  [0603-RES]  48.51,110.11 270 top
R141  4.7K  [0603-RES]  42.29,110.62 90 top
R142  100  [0603-RES]  34.04,113.92 270 top
R143  10K  [0603-RES]  34.04,105.66 180 top
R144  10K  [0603-RES]  45.47,105.66 180 top
R145  100  [0603-RES]  56.13,100.58 0 top
R146  100  [0603-RES]  67.56,100.58 0 top
R147  47K  [0603-RES]  59.18,106.43 270 top
R148  6.8K  [0603-RES]  59.18,109.98 270 top
R149  4.7K  [0603-RES]  52.96,110.62 90 top
R150  100  [0603-RES]  67.56,113.92 270 top
R151  47K  [0603-RES]  70.61,106.43 270 top
R152  6.8K  [0603-RES]  70.61,110.11 270 top
R153  4.7K  [0603-RES]  64.39,110.62 90 top
R154  100  [0603-RES]  56.13,113.92 270 top
R155  10K  [0603-RES]  56.13,105.66 180 top
R156  10K  [0603-RES]  67.56,105.66 180 top
R157  100  [0603-RES]  78.23,100.58 0 top
R158  100  [0603-RES]  89.66,100.58 0 top
R159  47K  [0603-RES]  81.28,106.43 270 top
R160  6.8K  [0603-RES]  81.28,109.98 270 top
R161  4.7K  [0603-RES]  75.06,110.62 90 top
R162  100  [0603-RES]  89.66,113.92 270 top
R163  47K  [0603-RES]  92.71,106.43 270 top
R164  6.8K  [0603-RES]  92.71,110.11 270 top
R165  4.7K  [0603-RES]  86.49,110.62 90 top
R166  100  [0603-RES]  78.23,113.92 270 top
R167  10K  [0603-RES]  78.23,105.66 180 top
R168  10K  [0603-RES]  89.66,105.66 180 top
R169  100  [0603-RES]  100.33,100.58 0 top
R170  100  [0603-RES]  111.76,100.58 0 top
R171  47K  [0603-RES]  103.38,106.43 270 top
R172  6.8K  [0603-RES]  103.38,109.98 270 top
R173  4.7K  [0603-RES]  97.16,110.62 90 top
R174  100  [0603-RES]  111.76,113.92 270 top
R175  47K  [0603-RES]  114.81,106.43 270 top
R176  6.8K  [0603-RES]  114.81,110.11 270 top
R177  4.7K  [0603-RES]  108.59,110.62 90 top
R178  100  [0603-RES]  100.33,113.92 270 top
R179  10K  [0603-RES]  100.33,105.66 180 top
R180  10K  [0603-RES]  111.76,105.66 180 top
STANDOFF1  STAND-OFF  [STAND-OFF]  17.65,9.4 0 top
STANDOFF2  STAND-OFF  [STAND-OFF]  17.65,42.42 0 top
STANDOFF3  STAND-OFF  [STAND-OFF]  39.75,9.4 0 top
STANDOFF4  STAND-OFF  [STAND-OFF]  39.75,42.42 0 top
STANDOFF5  STAND-OFF  [STAND-OFF]  61.85,9.4 0 top
STANDOFF6  STAND-OFF  [STAND-OFF]  61.85,42.42 0 top
STANDOFF7  STAND-OFF  [STAND-OFF]  83.95,9.4 0 top
STANDOFF8  STAND-OFF  [STAND-OFF]  83.95,42.42 0 top
STANDOFF9  STAND-OFF  [STAND-OFF]  106.05,9.4 0 top
STANDOFF10  STAND-OFF  [STAND-OFF]  106.05,42.42 0 top
STANDOFF11  STAND-OFF  [STAND-OFF]  17.65,49.28 0 top
STANDOFF12  STAND-OFF  [STAND-OFF]  17.65,82.3 0 top
STANDOFF13  STAND-OFF  [STAND-OFF]  39.75,49.28 0 top
STANDOFF14  STAND-OFF  [STAND-OFF]  39.75,82.3 0 top
STANDOFF15  STAND-OFF  [STAND-OFF]  61.85,49.28 0 top
STANDOFF16  STAND-OFF  [STAND-OFF]  61.85,82.3 0 top
STANDOFF17  STAND-OFF  [STAND-OFF]  83.95,49.28 0 top
STANDOFF18  STAND-OFF  [STAND-OFF]  83.95,82.3 0 top
STANDOFF19  STAND-OFF  [STAND-OFF]  106.05,49.28 0 top
STANDOFF20  STAND-OFF  [STAND-OFF]  106.05,82.3 0 top
STANDOFF21  STAND-OFF  [STAND-OFF]  17.65,89.15 0 top
STANDOFF22  STAND-OFF  [STAND-OFF]  17.65,122.17 0 top
STANDOFF23  STAND-OFF  [STAND-OFF]  39.75,89.15 0 top
STANDOFF24  STAND-OFF  [STAND-OFF]  39.75,122.17 0 top
STANDOFF25  STAND-OFF  [STAND-OFF]  61.85,89.15 0 top
STANDOFF26  STAND-OFF  [STAND-OFF]  61.85,122.17 0 top
STANDOFF27  STAND-OFF  [STAND-OFF]  83.95,89.15 0 top
STANDOFF28  STAND-OFF  [STAND-OFF]  83.95,122.17 0 top
STANDOFF29  STAND-OFF  [STAND-OFF]  106.05,89.15 0 top
STANDOFF30  STAND-OFF  [STAND-OFF]  106.05,122.17 0 top
U1  QRE1113  [QRE1113]  11.94,23.37 0 top
U2  QRE1113  [QRE1113]  23.37,23.37 0 top
U3  QRE1113  [QRE1113]  34.04,23.37 0 top
U4  QRE1113  [QRE1113]  45.47,23.37 0 top
U5  QRE1113  [QRE1113]  56.13,23.37 0 top
U6  QRE1113  [QRE1113]  67.56,23.37 0 top
U7  QRE1113  [QRE1113]  78.23,23.37 0 top
U8  QRE1113  [QRE1113]  89.66,23.37 0 top
U9  QRE1113  [QRE1113]  100.33,23.37 0 top
U10  QRE1113  [QRE1113]  111.76,23.37 0 top
U11  QRE1113  [QRE1113]  11.94,63.25 0 top
U12  QRE1113  [QRE1113]  23.37,63.25 0 top
U13  QRE1113  [QRE1113]  34.04,63.25 0 top
U14  QRE1113  [QRE1113]  45.47,63.25 0 top
U15  QRE1113  [QRE1113]  56.13,63.25 0 top
U16  QRE1113  [QRE1113]  67.56,63.25 0 top
U17  QRE1113  [QRE1113]  78.23,63.25 0 top
U18  QRE1113  [QRE1113]  89.66,63.25 0 top
U19  QRE1113  [QRE1113]  100.33,63.25 0 top
U20  QRE1113  [QRE1113]  111.76,63.25 0 top
U21  QRE1113  [QRE1113]  11.94,103.12 0 top
U22  QRE1113  [QRE1113]  23.37,103.12 0 top
U23  QRE1113  [QRE1113]  34.04,103.12 0 top
U24  QRE1113  [QRE1113]  45.47,103.12 0 top
U25  QRE1113  [QRE1113]  56.13,103.12 0 top
U26  QRE1113  [QRE1113]  67.56,103.12 0 top
U27  QRE1113  [QRE1113]  78.23,103.12 0 top
U28  QRE1113  [QRE1113]  89.66,103.12 0 top
U29  QRE1113  [QRE1113]  100.33,103.12 0 top
U30  QRE1113  [QRE1113]  111.76,103.12 0 top

## Library data of the parts
C1 C3 C4 C6 C8 C9 C12 C13 C15-C17 C20 C21 C23-C25 C28 C29 C31-C33 C36 C37 C39-C41 C44 C45 C47-C49 C52 C53 C55-C57 C60 C61 C63-C65 C68 C69 C71-C73 C76 C77 C79-C81 C84 C85 C87-C89 C92 C93 C95-C97 C100 C101 C103-C105 C108 C109 C111-C113 C116 C117 C119 C120 = SparkFun-Capacitors; PROD_ID: CAP-00810
C2 C5 C7 C10 C11 C14 C18 C19 C22 C26 C27 C30 C34 C35 C38 C42 C43 C46 C50 C51 C54 C58 C59 C62 C66 C67 C70 C74 C75 C78 C82 C83 C86 C90 C91 C94 C98 C99 C102 C106 C107 C110 C114 C115 C118 = SparkFun-Capacitors; PROD_ID: CAP-00868
E$1 E$4 E$5 FID1-FID30 LOGO1-LOGO45 = SparkFun-Aesthetics
JP1-JP15 = SparkFun-Connectors; PROD_ID: CONN-11415
Q1-Q30 = SparkFun-DiscreteSemi; PROD_ID: TRANS-08049
R1 R6 R7 R12-R14 R18 R22 R25 R26 R30 R34 R37 R38 R42 R46 R49 R50 R54 R58 R61 R62 R66 R70 R73 R74 R78 R82 R85 R86 R90 R94 R97 R98 R102 R106 R109 R110 R114 R118 R121 R122 R126 R130 R133 R134 R138 R142 R145 R146 R150 R154 R157 R158 R162 R166 R169 R170 R174 R178 = SparkFun-Resistors; PROD_ID: RES-07863
R2 R8 R23 R24 R35 R36 R47 R48 R59 R60 R71 R72 R83 R84 R95 R96 R107 R108 R119 R120 R131 R132 R143 R144 R155 R156 R167 R168 R179 R180 = SparkFun-Resistors; PROD_ID: RES-00824
R3 R9 R15 R19 R27 R31 R39 R43 R51 R55 R63 R67 R75 R79 R87 R91 R99 R103 R111 R115 R123 R127 R135 R139 R147 R151 R159 R163 R171 R175 = SparkFun-Resistors; PROD_ID: RES-07871
R4 R10 R16 R20 R28 R32 R40 R44 R52 R56 R64 R68 R76 R80 R88 R92 R100 R104 R112 R116 R124 R128 R136 R140 R148 R152 R160 R164 R172 R176 = SparkFun-Resistors; PROD_ID: RES-08597
R5 R11 R17 R21 R29 R33 R41 R45 R53 R57 R65 R69 R77 R81 R89 R93 R101 R105 R113 R117 R125 R129 R137 R141 R149 R153 R161 R165 R173 R177 = SparkFun-Resistors; PROD_ID: RES-07857
STANDOFF1-STANDOFF30 = SparkFun-Electromechanical
U1-U30 = SparkFun-Sensors; PROD_ID: IC-09357

## Nets
5V: C7.2 C8.1 JP1.3 JP1.4 R1.2 R3.2 R5.2 R7.2 R9.2 R11.2 U1.3 U2.3
5V1: C9.1 C14.2 JP2.3 JP2.4 R13.2 R14.2 R15.2 R17.2 R19.2 R21.2 U3.3 U4.3
5V2: C17.1 C22.2 JP3.3 JP3.4 R25.2 R26.2 R27.2 R29.2 R31.2 R33.2 U5.3 U6.3
5V3: C25.1 C30.2 JP4.3 JP4.4 R37.2 R38.2 R39.2 R41.2 R43.2 R45.2 U7.3 U8.3
5V4: C33.1 C38.2 JP5.3 JP5.4 R49.2 R50.2 R51.2 R53.2 R55.2 R57.2 U9.3 U10.3
5V5: C41.1 C46.2 JP6.3 JP6.4 R61.2 R62.2 R63.2 R65.2 R67.2 R69.2 U11.3 U12.3
5V6: C49.1 C54.2 JP7.3 JP7.4 R73.2 R74.2 R75.2 R77.2 R79.2 R81.2 U13.3 U14.3
5V7: C57.1 C62.2 JP8.3 JP8.4 R85.2 R86.2 R87.2 R89.2 R91.2 R93.2 U15.3 U16.3
5V8: C65.1 C70.2 JP9.3 JP9.4 R97.2 R98.2 R99.2 R101.2 R103.2 R105.2 U17.3 U18.3
5V9: C73.1 C78.2 JP10.3 JP10.4 R109.2 R110.2 R111.2 R113.2 R115.2 R117.2 U19.3 U20.3
5V10: C81.1 C86.2 JP11.3 JP11.4 R121.2 R122.2 R123.2 R125.2 R127.2 R129.2 U21.3 U22.3
5V11: C89.1 C94.2 JP12.3 JP12.4 R133.2 R134.2 R135.2 R137.2 R139.2 R141.2 U23.3 U24.3
5V12: C97.1 C102.2 JP13.3 JP13.4 R145.2 R146.2 R147.2 R149.2 R151.2 R153.2 U25.3 U26.3
5V13: C105.1 C110.2 JP14.3 JP14.4 R157.2 R158.2 R159.2 R161.2 R163.2 R165.2 U27.3 U28.3
5V14: C113.1 C118.2 JP15.3 JP15.4 R169.2 R170.2 R171.2 R173.2 R175.2 R177.2 U29.3 U30.3
GND: C1.2 C3.2 C4.2 C6.2 C7.1 C8.2 JP1.5 JP1.6 R2.1 R4.1 R6.1 R8.1 R10.1 R12.1 U1.2 U2.2
GND1: C9.2 C12.2 C13.2 C14.1 C15.2 C16.2 JP2.5 JP2.6 R16.1 R18.1 R20.1 R22.1 R23.1 R24.1 U3.2 U4.2
GND2: C17.2 C20.2 C21.2 C22.1 C23.2 C24.2 JP3.5 JP3.6 R28.1 R30.1 R32.1 R34.1 R35.1 R36.1 U5.2 U6.2
GND3: C25.2 C28.2 C29.2 C30.1 C31.2 C32.2 JP4.5 JP4.6 R40.1 R42.1 R44.1 R46.1 R47.1 R48.1 U7.2 U8.2
GND4: C33.2 C36.2 C37.2 C38.1 C39.2 C40.2 JP5.5 JP5.6 R52.1 R54.1 R56.1 R58.1 R59.1 R60.1 U9.2 U10.2
GND5: C41.2 C44.2 C45.2 C46.1 C47.2 C48.2 JP6.5 JP6.6 R64.1 R66.1 R68.1 R70.1 R71.1 R72.1 U11.2 U12.2
GND6: C49.2 C52.2 C53.2 C54.1 C55.2 C56.2 JP7.5 JP7.6 R76.1 R78.1 R80.1 R82.1 R83.1 R84.1 U13.2 U14.2
GND7: C57.2 C60.2 C61.2 C62.1 C63.2 C64.2 JP8.5 JP8.6 R88.1 R90.1 R92.1 R94.1 R95.1 R96.1 U15.2 U16.2
GND8: C65.2 C68.2 C69.2 C70.1 C71.2 C72.2 JP9.5 JP9.6 R100.1 R102.1 R104.1 R106.1 R107.1 R108.1 U17.2 U18.2
GND9: C73.2 C76.2 C77.2 C78.1 C79.2 C80.2 JP10.5 JP10.6 R112.1 R114.1 R116.1 R118.1 R119.1 R120.1 U19.2 U20.2
GND10: C81.2 C84.2 C85.2 C86.1 C87.2 C88.2 JP11.5 JP11.6 R124.1 R126.1 R128.1 R130.1 R131.1 R132.1 U21.2 U22.2
GND11: C89.2 C92.2 C93.2 C94.1 C95.2 C96.2 JP12.5 JP12.6 R136.1 R138.1 R140.1 R142.1 R143.1 R144.1 U23.2 U24.2
GND12: C97.2 C100.2 C101.2 C102.1 C103.2 C104.2 JP13.5 JP13.6 R148.1 R150.1 R152.1 R154.1 R155.1 R156.1 U25.2 U26.2
GND13: C105.2 C108.2 C109.2 C110.1 C111.2 C112.2 JP14.5 JP14.6 R160.1 R162.1 R164.1 R166.1 R167.1 R168.1 U27.2 U28.2
GND14: C113.2 C116.2 C117.2 C118.1 C119.2 C120.2 JP15.5 JP15.6 R172.1 R174.1 R176.1 R178.1 R179.1 R180.1 U29.2 U30.2
N$1: C1.1 C2.1 R2.2 U1.4
N$2: C2.2 Q1.1 R3.1 R4.2
N$3: C3.1 Q1.2 R6.2
N$4: R13.1 U3.1
N$5: R1.1 U1.1
N$6: R14.1 U4.1
N$7: C6.1 Q2.2 R12.2
N$8: C4.1 C5.1 R8.2 U2.4
N$9: C5.2 Q2.1 R9.1 R10.2
N$10: R7.1 U2.1
N$11: C10.1 C15.1 R23.2 U3.4
N$12: C10.2 Q3.1 R15.1 R16.2
N$13: C12.1 Q3.2 R22.2
N$14: C13.1 Q4.2 R18.2
N$15: C11.1 C16.1 R24.2 U4.4
N$16: C11.2 Q4.1 R19.1 R20.2
N$17: R25.1 U5.1
N$18: R26.1 U6.1
N$19: C18.1 C23.1 R35.2 U5.4
N$20: C18.2 Q5.1 R27.1 R28.2
N$21: C20.1 Q5.2 R34.2
N$22: C21.1 Q6.2 R30.2
N$23: C19.1 C24.1 R36.2 U6.4
N$24: C19.2 Q6.1 R31.1 R32.2
N$25: R37.1 U7.1
N$26: R38.1 U8.1
N$27: C26.1 C31.1 R47.2 U7.4
N$28: C26.2 Q7.1 R39.1 R40.2
N$29: C28.1 Q7.2 R46.2
N$30: C29.1 Q8.2 R42.2
N$31: C27.1 C32.1 R48.2 U8.4
N$32: C27.2 Q8.1 R43.1 R44.2
N$33: R49.1 U9.1
N$34: R50.1 U10.1
N$35: C34.1 C39.1 R59.2 U9.4
N$36: C34.2 Q9.1 R51.1 R52.2
N$37: C36.1 Q9.2 R58.2
N$38: C37.1 Q10.2 R54.2
N$39: C35.1 C40.1 R60.2 U10.4
N$40: C35.2 Q10.1 R55.1 R56.2
N$41: R61.1 U11.1
N$42: R62.1 U12.1
N$43: C42.1 C47.1 R71.2 U11.4
N$44: C42.2 Q11.1 R63.1 R64.2
N$45: C44.1 Q11.2 R70.2
N$46: C45.1 Q12.2 R66.2
N$47: C43.1 C48.1 R72.2 U12.4
N$48: C43.2 Q12.1 R67.1 R68.2
N$49: R73.1 U13.1
N$50: R74.1 U14.1
N$51: C50.1 C55.1 R83.2 U13.4
N$52: C50.2 Q13.1 R75.1 R76.2
N$53: C52.1 Q13.2 R82.2
N$54: C53.1 Q14.2 R78.2
N$55: C51.1 C56.1 R84.2 U14.4
N$56: C51.2 Q14.1 R79.1 R80.2
N$57: R85.1 U15.1
N$58: R86.1 U16.1
N$59: C58.1 C63.1 R95.2 U15.4
N$60: C58.2 Q15.1 R87.1 R88.2
N$61: C60.1 Q15.2 R94.2
N$62: C61.1 Q16.2 R90.2
N$63: C59.1 C64.1 R96.2 U16.4
N$64: C59.2 Q16.1 R91.1 R92.2
N$65: R97.1 U17.1
N$66: R98.1 U18.1
N$67: C66.1 C71.1 R107.2 U17.4
N$68: C66.2 Q17.1 R99.1 R100.2
N$69: C68.1 Q17.2 R106.2
N$70: C69.1 Q18.2 R102.2
N$71: C67.1 C72.1 R108.2 U18.4
N$72: C67.2 Q18.1 R103.1 R104.2
N$73: R109.1 U19.1
N$74: R110.1 U20.1
N$75: C74.1 C79.1 R119.2 U19.4
N$76: C74.2 Q19.1 R111.1 R112.2
N$77: C76.1 Q19.2 R118.2
N$78: C77.1 Q20.2 R114.2
N$79: C75.1 C80.1 R120.2 U20.4
N$80: C75.2 Q20.1 R115.1 R116.2
N$81: R121.1 U21.1
N$82: R122.1 U22.1
N$83: C82.1 C87.1 R131.2 U21.4
N$84: C82.2 Q21.1 R123.1 R124.2
N$85: C84.1 Q21.2 R130.2
N$86: C85.1 Q22.2 R126.2
N$87: C83.1 C88.1 R132.2 U22.4
N$88: C83.2 Q22.1 R127.1 R128.2
N$89: R133.1 U23.1
N$90: R134.1 U24.1
N$91: C90.1 C95.1 R143.2 U23.4
N$92: C90.2 Q23.1 R135.1 R136.2
N$93: C92.1 Q23.2 R142.2
N$94: C93.1 Q24.2 R138.2
N$95: C91.1 C96.1 R144.2 U24.4
N$96: C91.2 Q24.1 R139.1 R140.2
N$97: R145.1 U25.1
N$98: R146.1 U26.1
N$99: C98.1 C103.1 R155.2 U25.4
N$100: C98.2 Q25.1 R147.1 R148.2
N$101: C100.1 Q25.2 R154.2
N$102: C101.1 Q26.2 R150.2
N$103: C99.1 C104.1 R156.2 U26.4
N$104: C99.2 Q26.1 R151.1 R152.2
N$105: R157.1 U27.1
N$106: R158.1 U28.1
N$107: C106.1 C111.1 R167.2 U27.4
N$108: C106.2 Q27.1 R159.1 R160.2
N$109: C108.1 Q27.2 R166.2
N$110: C109.1 Q28.2 R162.2
N$111: C107.1 C112.1 R168.2 U28.4
N$112: C107.2 Q28.1 R163.1 R164.2
N$113: R169.1 U29.1
N$114: R170.1 U30.1
N$115: C114.1 C119.1 R179.2 U29.4
N$116: C114.2 Q29.1 R171.1 R172.2
N$117: C116.1 Q29.2 R178.2
N$118: C117.1 Q30.2 R174.2
N$119: C115.1 C120.1 R180.2 U30.4
N$120: C115.2 Q30.1 R175.1 R176.2
OUTA: JP1.2 Q1.3 R5.1
OUTA1: JP2.2 Q3.3 R17.1
OUTA2: JP3.2 Q5.3 R29.1
OUTA3: JP4.2 Q7.3 R41.1
OUTA4: JP5.2 Q9.3 R53.1
OUTA5: JP6.2 Q11.3 R65.1
OUTA6: JP7.2 Q13.3 R77.1
OUTA7: JP8.2 Q15.3 R89.1
OUTA8: JP9.2 Q17.3 R101.1
OUTA9: JP10.2 Q19.3 R113.1
OUTA10: JP11.2 Q21.3 R125.1
OUTA11: JP12.2 Q23.3 R137.1
OUTA12: JP13.2 Q25.3 R149.1
OUTA13: JP14.2 Q27.3 R161.1
OUTA14: JP15.2 Q29.3 R173.1
OUTB: JP1.1 Q2.3 R11.1
OUTB1: JP2.1 Q4.3 R21.1
OUTB2: JP3.1 Q6.3 R33.1
OUTB3: JP4.1 Q8.3 R45.1
OUTB4: JP5.1 Q10.3 R57.1
OUTB5: JP6.1 Q12.3 R69.1
OUTB6: JP7.1 Q14.3 R81.1
OUTB7: JP8.1 Q16.3 R93.1
OUTB8: JP9.1 Q18.3 R105.1
OUTB9: JP10.1 Q20.3 R117.1
OUTB10: JP11.1 Q22.3 R129.1
OUTB11: JP12.1 Q24.3 R141.1
OUTB12: JP13.1 Q26.3 R153.1
OUTB13: JP14.1 Q28.3 R165.1
OUTB14: JP15.1 Q30.3 R177.1